# Altium PCB opm.PcbDoc (part 5 of 6)
Units mil, origin at the board's own origin, x right, y up, seen from the top; angles counter-clockwise.
Board outline 4280 x 1445 mil, 4 copper layers (Signal Plane 1, Ground, Power, Signal Plane 2), stack 59.778 mil thick; 104 components, 61 nets, 369 pads, 159 vias.
Unrouted connection lines stored in the file: 4.
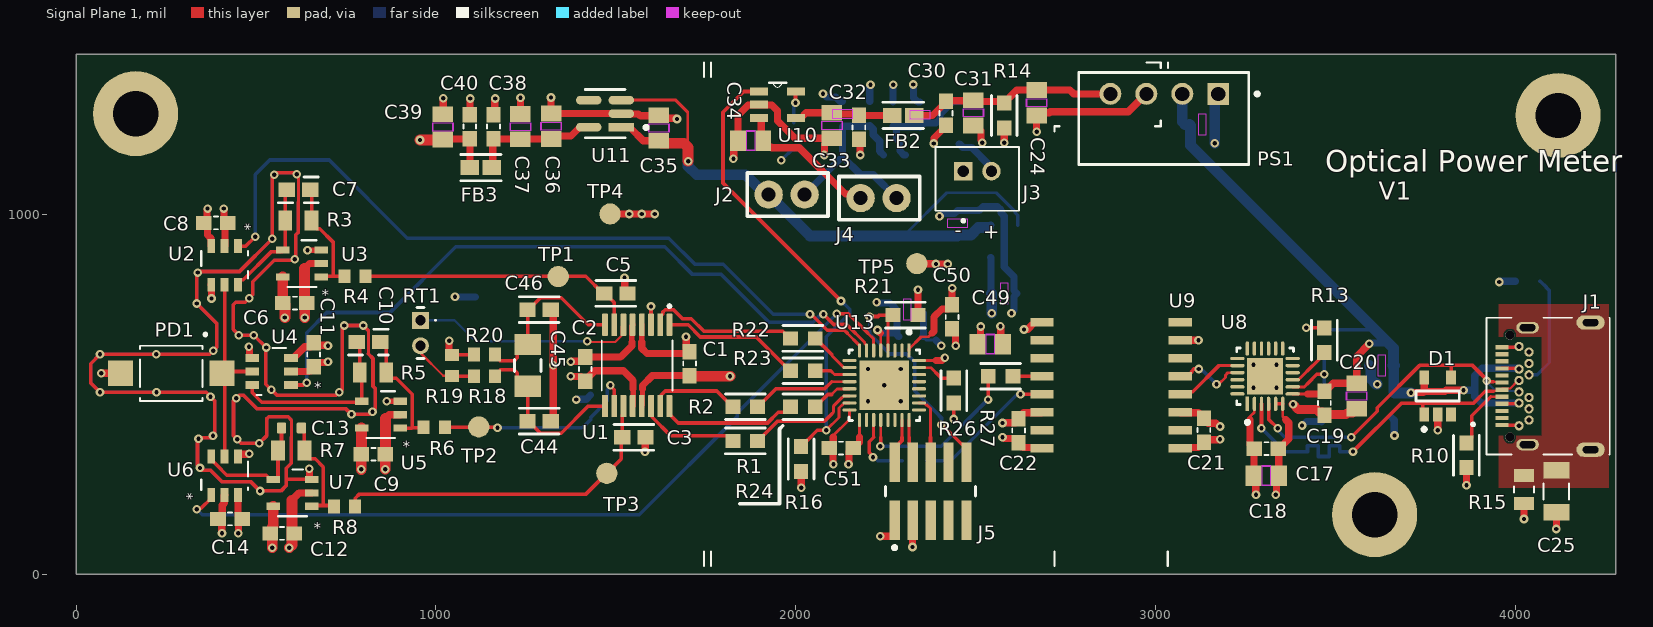
[diagram p0: Signal Plane 1 view]

## Part data (continued)
U3 U5 U7: "Operational Amplifier, 1 Func, 10uV Offset-Max, CMOS, PDSO5", Case/Package=SOT-23, Manufacturer="Texas Instruments", Manufacturer Lifecycle Status=ACTIVE, Supplier Part Number=296-OPA392DBVRCT-ND, Category="Amplifiers - Op Amps, Buffer, Instrumentation", ComponentLink1Description=https://sigma.octopart.com:443/177332311/technical_drawing/Texas-Instruments-OPA392DBVR.pdf?src-supplier=Texas+Instruments, ComponentLink1URL=https://sigma.octopart.com:443/177332311/technical_drawing/Texas-Instruments-OPA392DBVR.pdf?src-supplier=Texas+Instruments, ComponentLink2Description=https://octopart.com:443/opatz8j6/c1?t=2psdxfNSZafVxdZ5ZNOl_DMkcfXgAtcE5XO0nlhC9-kLTH0c2kP_E6ruHRV4RGEK38csRC_DYUSTnen_0j9aC9POSpKpd2mOmgIqO1TNZiXP5ogQozriVbhzqyHbfblWK9OPstIRr3cIrP4FTJ3WcbJ8ET0v1-Z7kljowUcj_5K4IJqpraLjHJ5d995DU-lA3G2MPIFIXdaph2QRYft4ozPdd11jQDbsfTgRIyz7ERvETa37RUgzg66PFoB_swOAjP9cfoHRkuZkn4NuOIfyLPnaU4R5TYlgQQeAViWQJQio1V6w93uzbKeQY1bgaQenG3g0HikSLeAPpnaTmz4osCeyHBYWX4HUltq8GmsHKlpVITfwiReMVGzsZjFepJ_Thh7pRw&src-supplier=Texas+Instruments, ComponentLink2URL=https://octopart.com:443/opatz8j6/c1?t=2psdxfNSZafVxdZ5ZNOl_DMkcfXgAtcE5XO0nlhC9-kLTH0c2kP_E6ruHRV4RGEK38csRC_DYUSTnen_0j9aC9POSpKpd2mOmgIqO1TNZiXP5ogQozriVbhzqyHbfblWK9OPstIRr3cIrP4FTJ3WcbJ8ET0v1-Z7kljowUcj_5K4IJqpraLjHJ5d995DU-lA3G2MPIFIXdaph2QRYft4ozPdd11jQDbsfTgRIyz7ERvETa37RUgzg66PFoB_swOAjP9cfoHRkuZkn4NuOIfyLPnaU4R5TYlgQQeAViWQJQio1V6w93uzbKeQY1bgaQenG3g0HikSLeAPpnaTmz4osCeyHBYWX4HUltq8GmsHKlpVITfwiReMVGzsZjFepJ_Thh7pRw&src-supplier=Texas+Instruments, ComponentLink3Description=https://sigma.octopart.com:443/175570406/technical_drawing/Texas-Instruments-OPA392DBVR.pdf?src-supplier=Texas+Instruments, ComponentLink3URL=https://sigma.octopart.com:443/175570406/technical_drawing/Texas-Instruments-OPA392DBVR.pdf?src-supplier=Texas+Instruments, ComponentLink4Description=https://sigma.octopart.com:443/169406034/technical_drawing/Texas-Instruments-OPA392DBVR.pdf?src-supplier=Texas+Instruments, ComponentLink4URL=https://sigma.octopart.com:443/169406034/technical_drawing/Texas-Instruments-OPA392DBVR.pdf?src-supplier=Texas+Instruments, ComponentLink5Description=https://sigma.octopart.com:443/155939316/technical_drawing/Texas-Instruments-OPA392DBVR.pdf?src-supplier=Texas+Instruments, ComponentLink5URL=https://sigma.octopart.com:443/155939316/technical_drawing/Texas-Instruments-OPA392DBVR.pdf?src-supplier=Texas+Instruments, ComponentLink6Description=https://datasheet.octopart.com:443/OPA392DBVR-Texas-Instruments-datasheet-178481860.pdf?src-supplier=LCSC, ComponentLink6URL=https://datasheet.octopart.com:443/OPA392DBVR-Texas-Instruments-datasheet-178481860.pdf?src-supplier=LCSC, ComponentLink7Description=https://datasheet.octopart.com:443/OPA392DBVR-Texas-Instruments-datasheet-166100503.pdf?src-supplier=Augswan, ComponentLink7URL=https://datasheet.octopart.com:443/OPA392DBVR-Texas-Instruments-datasheet-166100503.pdf?src-supplier=Augswan, ComponentLink8Description=https://datasheet.octopart.com:443/OPA392DBVR-Texas-Instruments-datasheet-165811579.pdf?src-supplier=SHENGYU+ELECTRONICS, ComponentLink8URL=https://datasheet.octopart.com:443/OPA392DBVR-Texas-Instruments-datasheet-165811579.pdf?src-supplier=SHENGYU+ELECTRONICS, ComponentLink9Description=http://sigma.octopart.com:80/reach_statement/Texas-Instruments-company-64.pdf?src-supplier=Compliance+Statements, ComponentLink9URL=http://sigma.octopart.com:80/reach_statement/Texas-Instruments-company-64.pdf?src-supplier=Compliance+Statements, ComponentLink10Description=http://sigma.octopart.com:80/conflict_mineral_statement/Texas-Instruments-company-63.pdf?src-supplier=Compliance+Statements, ComponentLink10URL=http://sigma.octopart.com:80/conflict_mineral_statement/Texas-Instruments-company-63.pdf?src-supplier=Compliance+Statements, Height=1.45mm, Length=2.9mm, Lifecycle Status=Production, Manufacturer Part Number=OPA392DBVR, Number of Channels=1, Pins=5, Pricing="1=2.31, 10=1.711, 25=1.5616, 100=1.3976, 250=1.31936, 500=1.27218, 1000=1.23335 (USD)", RoHS=Compliant, Stock=8819, Supplier=DigiKey, Supplier 1=DigiKey, Supplier Part Number 1=296-OPA392DBVRCT-ND, Thickness=1.2mm, Width=1.6mm
U8: "Full Speed USB to UART Bridge USB 2.0 3.3V T/R Automotive Medical 24-Pin QFN EP", Ambient Temperature Range High=85°C, Manufacturer="Silicon Lab", Manufacturer Lifecycle Status="FULL PRODUCTION", Max Junction Temperature (Tj)=105°C, Max Supply Voltage=3.6V, Min Operating Temperature=-40°C, Min Supply Voltage=3V, Operating Supply Voltage=3.3V, Supplier Part Number=336-5888-1-ND, Category="USB Interface ICs", China RoHS=Compliant, ComponentLink1Description=https://datasheet.octopart.com:443/CP2102N-A02-GQFN24R-Silicon-Labs-datasheet-138898368.pdf?src-supplier=SHENGYU+ELECTRONICS, ComponentLink1URL=https://datasheet.octopart.com:443/CP2102N-A02-GQFN24R-Silicon-Labs-datasheet-138898368.pdf?src-supplier=SHENGYU+ELECTRONICS, ComponentLink2Description=https://datasheet.octopart.com:443/CP2102N-A02-GQFN24R-Silicon-Labs-datasheet-166051788.pdf?src-supplier=Burklin+Elektronik, ComponentLink2URL=https://datasheet.octopart.com:443/CP2102N-A02-GQFN24R-Silicon-Labs-datasheet-166051788.pdf?src-supplier=Burklin+Elektronik, Data Rate=1.5Mbps, Harmonized Tariff Schedule (HTS) Code=8542.31.00.30, Height=800µm, Height - Seated (Max)=800µm, Interface=UART, Introduction Date=2019-03-12, Length=4mm, Lifecycle Status=Production, Manufacturer Part Number=CP2102N-A02-GQFN24R, Max Operating Temperature=85°C, Number of Digital IO=4, Number of Terminals=24, Pricing="1=4.14, 10=3.135, 25=2.8832, 100=2.6064, 250=2.4744, 500=2.39488, 1500=2.29663, 3000=2.24855 (USD)", REACH SVHC=Yes, RoHS=Compliant, Schedule B="8542390000, 8542390000|8542390000|8542390000|8542390000|8542390000", Stock=4906, Supplier=DigiKey, Supplier 1=DigiKey, Supplier Part Number 1=336-5888-1-ND, Terminal Pitch=500µm, Width=4mm
U9: "Robust EMC, dual-channel, 1/1, reinforced digital isolator 16-SOIC -55 to 125", Case/Package=SOIC, Manufacturer="Texas Instruments", Manufacturer Lifecycle Status=ACTIVE, Max Operating Temperature=125°C, Min Operating Temperature=-55°C, Supplier Part Number=296-50346-1-ND, Category="Digital Isolators", ComponentLink1Description=https://sigma.octopart.com:443/99572200/technical_drawing/Texas-Instruments-ISO7721FDWR.pdf?src-supplier=Texas+Instruments, ComponentLink1URL=https://sigma.octopart.com:443/99572200/technical_drawing/Texas-Instruments-ISO7721FDWR.pdf?src-supplier=Texas+Instruments, ComponentLink2Description=https://octopart.com:443/opatz8j6/c1?t=7fYOYtwNBUEaReeiSNPKR-IQTSHtPzZLpEVsYW50-rI4JUCIXMgBGopjK2FdCQMXUXQ-KoFbFgS2LTJLiiX2WyWA5udG3IK2j6SgmN4JQvkXOYML3Ru7cjprp3Zc3qOpQdFanhYDUQW26ho2EsapyHcXMNt5EZdsXuKUN3ISaEbLkfiXXEzz7HEq8WMwRB8Aqd5tdK01DpiPJHkcMp10MHJRnMsJhn7JgtWigsYiqP7VY3Loe05ONAdv-SR9SBa75Bo6RB95V0VZTFuhoHL9pJR-cKwyNCiWL4P9UL-Wk2sTIQiD-yqPyAT38kYpY1lIfmL_2dTAxBFtMmWy2P2-vcTNy0fZSuyP9lqQvE83YPMmP1FF12k6hwHlrQbjr1kRsM-PxQ&src-supplier=Texas+Instruments, ComponentLink2URL=https://octopart.com:443/opatz8j6/c1?t=7fYOYtwNBUEaReeiSNPKR-IQTSHtPzZLpEVsYW50-rI4JUCIXMgBGopjK2FdCQMXUXQ-KoFbFgS2LTJLiiX2WyWA5udG3IK2j6SgmN4JQvkXOYML3Ru7cjprp3Zc3qOpQdFanhYDUQW26ho2EsapyHcXMNt5EZdsXuKUN3ISaEbLkfiXXEzz7HEq8WMwRB8Aqd5tdK01DpiPJHkcMp10MHJRnMsJhn7JgtWigsYiqP7VY3Loe05ONAdv-SR9SBa75Bo6RB95V0VZTFuhoHL9pJR-cKwyNCiWL4P9UL-Wk2sTIQiD-yqPyAT38kYpY1lIfmL_2dTAxBFtMmWy2P2-vcTNy0fZSuyP9lqQvE83YPMmP1FF12k6hwHlrQbjr1kRsM-PxQ&src-supplier=Texas+Instruments, ComponentLink3Description=https://sigma.octopart.com:443/49250197/technical_drawing/Texas-Instruments-ISO7721FDWR.pdf?src-supplier=Texas+Instruments, ComponentLink3URL=https://sigma.octopart.com:443/49250197/technical_drawing/Texas-Instruments-ISO7721FDWR.pdf?src-supplier=Texas+Instruments, ComponentLink4Description=https://datasheet.octopart.com:443/ISO7721FDWR-Texas-Instruments-datasheet-164414773.pdf?src-supplier=Augswan, ComponentLink4URL=https://datasheet.octopart.com:443/ISO7721FDWR-Texas-Instruments-datasheet-164414773.pdf?src-supplier=Augswan, ComponentLink5Description=https://datasheet.octopart.com:443/ISO7721FDWR-Texas-Instruments-datasheet-82513802.pdf?src-supplier=HQonline, ComponentLink5URL=https://datasheet.octopart.com:443/ISO7721FDWR-Texas-Instruments-datasheet-82513802.pdf?src-supplier=HQonline, ComponentLink6Description=http://sigma.octopart.com:80/reach_statement/Texas-Instruments-company-64.pdf?src-supplier=Compliance+Statements, ComponentLink6URL=http://sigma.octopart.com:80/reach_statement/Texas-Instruments-company-64.pdf?src-supplier=Compliance+Statements, ComponentLink7Description=http://sigma.octopart.com:80/conflict_mineral_statement/Texas-Instruments-company-63.pdf?src-supplier=Compliance+Statements, ComponentLink7URL=http://sigma.octopart.com:80/conflict_mineral_statement/Texas-Instruments-company-63.pdf?src-supplier=Compliance+Statements, Height=2.65mm, Length=10.3mm, Lifecycle Status=Production, Manufacturer Part Number=ISO7721FDWR, Number of Channels=2, Pins=16, Pricing="1=2.6, 10=1.935, 25=1.7688, 100=1.5864, 250=1.49932, 500=1.44684, 1000=1.40365 (USD)", RoHS=Compliant, Schedule B=8542390000, Stock=15300, Supplier=DigiKey, Supplier 1=DigiKey, Supplier Part Number 1=296-50346-1-ND, Thickness=2.35mm, Width=7.5mm
U10: "MCP73831 Series Single-Cell Li-Ion/Li-Polymer Battery Charge Controller SOT-23-5", Ambient Temperature Range High=85°C, Case/Package=SOT-23, Drain to Source Resistance=350mΩ, Manufacturer=Microchip, Manufacturer Lifecycle Status=REL, Max Charge Current=500mA, Max Junction Temperature (Tj)=125°C, Max Output Voltage=4.5V, Max Power Dissipation=1.54W, Max Supply Voltage=6V, Min Operating Temperature=-40°C, Min Output Voltage=4.168V, Min Supply Voltage=3.75V, Output Voltage=4.2V, Supplier Part Number=MCP73831T-2ACI/OTCT-ND, Voltage Rating=4.534V, Category="Battery Management", ComponentLink1Description=https://datasheet.octopart.com:443/MCP73831T-2ACI-OT-Microchip-datasheet-8814540.pdf?src-supplier=element14+APAC, ComponentLink1URL=https://datasheet.octopart.com:443/MCP73831T-2ACI-OT-Microchip-datasheet-8814540.pdf?src-supplier=element14+APAC, ComponentLink2Description=https://datasheet.octopart.com:443/MCP73831T-2ACI-OT-Microchip-datasheet-145017548.pdf?src-supplier=Microchip, ComponentLink2URL=https://datasheet.octopart.com:443/MCP73831T-2ACI-OT-Microchip-datasheet-145017548.pdf?src-supplier=Microchip, ComponentLink3Description=https://datasheet.octopart.com:443/MCP73831T-2ACI-OT-Microchip-datasheet-34193478.pdf?src-supplier=Farnell, ComponentLink3URL=https://datasheet.octopart.com:443/MCP73831T-2ACI-OT-Microchip-datasheet-34193478.pdf?src-supplier=Farnell, ComponentLink4Description=https://datasheet.octopart.com:443/MCP73831T-2ACI-OT-Microchip-datasheet-16123459.pdf?src-supplier=LKR, ComponentLink4URL=https://datasheet.octopart.com:443/MCP73831T-2ACI-OT-Microchip-datasheet-16123459.pdf?src-supplier=LKR, ComponentLink5Description=https://datasheet.octopart.com:443/MCP73831T-2ACI-OT-Microchip-datasheet-142675560.pdf?src-supplier=TME, ComponentLink5URL=https://datasheet.octopart.com:443/MCP73831T-2ACI-OT-Microchip-datasheet-142675560.pdf?src-supplier=TME, ComponentLink6Description=https://datasheet.octopart.com:443/MCP73831T-2ACI-OT-Microchip-datasheet-158592061.pdf?src-supplier=SHENGYU+ELECTRONICS, ComponentLink6URL=https://datasheet.octopart.com:443/MCP73831T-2ACI-OT-Microchip-datasheet-158592061.pdf?src-supplier=SHENGYU+ELECTRONICS, ComponentLink7Description=https://datasheet.octopart.com/MCP73831T-2ACI-OT-Microchip-datasheet-16593012.pdf, ComponentLink7URL=https://datasheet.octopart.com/MCP73831T-2ACI-OT-Microchip-datasheet-16593012.pdf, ComponentLink8Description=https://datasheet.octopart.com:443/MCP73831T-2ACI-OT-Microchip-datasheet-7127743.pdf?src-supplier=Newark, ComponentLink8URL=https://datasheet.octopart.com:443/MCP73831T-2ACI-OT-Microchip-datasheet-7127743.pdf?src-supplier=Newark, ComponentLink9Description=https://datasheet.octopart.com:443/MCP73831T-2ACIOT-Microchip-datasheet-39874.pdf?src-supplier=RS+(Formerly+Allied+Electronics), ComponentLink9URL=https://datasheet.octopart.com:443/MCP73831T-2ACIOT-Microchip-datasheet-39874.pdf?src-supplier=RS+(Formerly+Allied+Electronics), ComponentLink10Description=http://sigma.octopart.com:80/188449423/materials_sheet/Microchip-MCP73831T-2ACI-OT.pdf?src-supplier=Compliance+Statements, ComponentLink10URL=http://sigma.octopart.com:80/188449423/materials_sheet/Microchip-MCP73831T-2ACI-OT.pdf?src-supplier=Compliance+Statements, ComponentLink11Description=http://sigma.octopart.com:80/rohs_statement/Microchip-company-71.pdf?src-supplier=Compliance+Statements, ComponentLink11URL=http://sigma.octopart.com:80/rohs_statement/Microchip-company-71.pdf?src-supplier=Compliance+Statements, ComponentLink12Description=http://sigma.octopart.com:80/reach_statement/Microchip-company-70.pdf?src-supplier=Compliance+Statements, ComponentLink12URL=http://sigma.octopart.com:80/reach_statement/Microchip-company-70.pdf?src-supplier=Compliance+Statements, ComponentLink13Description=http://sigma.octopart.com:80/conflict_mineral_statement/Microchip-company-69.pdf?src-supplier=Compliance+Statements, ComponentLink13URL=http://sigma.octopart.com:80/conflict_mineral_statement/Microchip-company-69.pdf?src-supplier=Compliance+Statements, ComponentLink14Description=http://sigma.octopart.com:80/conflict_mineral_statement/Microchip-company-68.pdf?src-supplier=Compliance+Statements, ComponentLink14URL=http://sigma.octopart.com:80/conflict_mineral_statement/Microchip-company-68.pdf?src-supplier=Compliance+Statements, Contact Plating=Tin, Country of Assembly=Thailand, Country of Fabrication="United States of America", Country of Origin=Thailand, Export Control Classification Number (ECCN) Code=EAR99, Harmonized Tariff Schedule (HTS) Code=8542.39.0060, Height=1.45mm, Introduction Date=2005-11-03, Length=3.0988mm, Lifecycle Status=Production, Manufacturer Part Number=MCP73831T-2ACI/OT, Max Operating Temperature=85°C, Mounting Technology="Surface Mount", Nominal Supply Voltage=6V, Number of Cells=1, Number of Channels=1, Number of Outputs=1, Output Current=500mA, Packaging="Cut Tape", Pins=5, Pricing="1=0.76, 25=0.63, 100=0.6125, 3000=0.6125 (USD)", Projected EOL Date=2034-11-03, Radiation Hardening=No, REACH SVHC=No, RoHS=Compliant, Schedule B="8542390000, 8542390000|8542390000|8542390000|8542390000|8542390000", Stock=57203, Supplier=DigiKey, Supplier 1=DigiKey, Supplier Part Number 1=MCP73831T-2ACI/OTCT-ND, Termination=SMD/SMT, Weight=200.998119mg, Width=1.8034mm
U11 U12: "300mA ultra-low-noise low-IQ low-dropout (LDO) linear regulator with high PSRR 5-SOT-23 -40 to 125", Case/Package=SOT-23, Dropout Voltage=145mV, Manufacturer="Texas Instruments", Manufacturer Lifecycle Status=ACTIVE, Max Junction Temperature (Tj)=125°C, Max Supply Voltage=6V, Min Operating Temperature=-40°C, Min Supply Voltage=1.6V, Nominal Supply Current=6.5µA, Output Current=300mA, Output Voltage=3.3V, Supplier Part Number=296-TPS7A2033PDBVRCT-ND, Accuracy=1.5%, Category="LDO Voltage Regulators", ComponentLink1Description=https://sigma.octopart.com:443/177332311/technical_drawing/Texas-Instruments-TPS7A2033PDBVR.pdf?src-supplier=Texas+Instruments, ComponentLink1URL=https://sigma.octopart.com:443/177332311/technical_drawing/Texas-Instruments-TPS7A2033PDBVR.pdf?src-supplier=Texas+Instruments, ComponentLink2Description=https://octopart.com:443/opatz8j6/c1?t=Ma8ufZnKKk_4ATfb14C_eP2QaxaiRthHQJtKusmYO_-I-6JGC8iIHetUtRdC5_axeXbCEdVp9wf_UwcPfgqubJ4i_D6qxU8SH4zIHwfuYwWyVKByeVOCLRFSq0GW-XiuJKOUh-wBrdD1nXJo4BUqX6aY_fyM7an4T8o1CX0IhOMrpo-oNm9IOAR28j7MeTK7I80W1Eorou5WEQqXmriVDRoiwD2NotTqdNxlTSj-cN8Ykvc373_5CdeRBai5zApiAgYKppeYOSbOx6psnqsn0rxystwDVuxyyyHYJZzgtMnq9lljAfaZpyzHt9L8kxL0UNrlsEGw1j5X7uv7jHvLsJxySSnFKRKe-mWLHk6Ye7ZFi91ueAVDnT7aMGRA6_kgJkxV3l4&src-supplier=Texas+Instruments, ComponentLink2URL=https://octopart.com:443/opatz8j6/c1?t=Ma8ufZnKKk_4ATfb14C_eP2QaxaiRthHQJtKusmYO_-I-6JGC8iIHetUtRdC5_axeXbCEdVp9wf_UwcPfgqubJ4i_D6qxU8SH4zIHwfuYwWyVKByeVOCLRFSq0GW-XiuJKOUh-wBrdD1nXJo4BUqX6aY_fyM7an4T8o1CX0IhOMrpo-oNm9IOAR28j7MeTK7I80W1Eorou5WEQqXmriVDRoiwD2NotTqdNxlTSj-cN8Ykvc373_5CdeRBai5zApiAgYKppeYOSbOx6psnqsn0rxystwDVuxyyyHYJZzgtMnq9lljAfaZpyzHt9L8kxL0UNrlsEGw1j5X7uv7jHvLsJxySSnFKRKe-mWLHk6Ye7ZFi91ueAVDnT7aMGRA6_kgJkxV3l4&src-supplier=Texas+Instruments, ComponentLink3Description=https://sigma.octopart.com:443/175570406/technical_drawing/Texas-Instruments-TPS7A2033PDBVR.pdf?src-supplier=Texas+Instruments, ComponentLink3URL=https://sigma.octopart.com:443/175570406/technical_drawing/Texas-Instruments-TPS7A2033PDBVR.pdf?src-supplier=Texas+Instruments, ComponentLink4Description=https://sigma.octopart.com:443/169406034/technical_drawing/Texas-Instruments-TPS7A2033PDBVR.pdf?src-supplier=Texas+Instruments, ComponentLink4URL=https://sigma.octopart.com:443/169406034/technical_drawing/Texas-Instruments-TPS7A2033PDBVR.pdf?src-supplier=Texas+Instruments, ComponentLink5Description=https://sigma.octopart.com:443/155939316/technical_drawing/Texas-Instruments-TPS7A2033PDBVR.pdf?src-supplier=Texas+Instruments, ComponentLink5URL=https://sigma.octopart.com:443/155939316/technical_drawing/Texas-Instruments-TPS7A2033PDBVR.pdf?src-supplier=Texas+Instruments, ComponentLink6Description=https://datasheet.octopart.com:443/TPS7A2033PDBVR-Texas-Instruments-datasheet-149070019.pdf?src-supplier=Upverter, ComponentLink6URL=https://datasheet.octopart.com:443/TPS7A2033PDBVR-Texas-Instruments-datasheet-149070019.pdf?src-supplier=Upverter, ComponentLink7Description=https://datasheet.octopart.com:443/TPS7A2033PDBVR-Texas-Instruments-datasheet-164420832.pdf?src-supplier=Augswan, ComponentLink7URL=https://datasheet.octopart.com:443/TPS7A2033PDBVR-Texas-Instruments-datasheet-164420832.pdf?src-supplier=Augswan, ComponentLink8Description=https://datasheet.octopart.com:443/TPS7A2033PDBVR-Texas-Instruments-datasheet-159781690.pdf?src-supplier=LCSC, ComponentLink8URL=https://datasheet.octopart.com:443/TPS7A2033PDBVR-Texas-Instruments-datasheet-159781690.pdf?src-supplier=LCSC, ComponentLink9Description=http://sigma.octopart.com:80/reach_statement/Texas-Instruments-company-64.pdf?src-supplier=Compliance+Statements, ComponentLink9URL=http://sigma.octopart.com:80/reach_statement/Texas-Instruments-company-64.pdf?src-supplier=Compliance+Statements, ComponentLink10Description=http://sigma.octopart.com:80/conflict_mineral_statement/Texas-Instruments-company-63.pdf?src-supplier=Compliance+Statements, ComponentLink10URL=http://sigma.octopart.com:80/conflict_mineral_statement/Texas-Instruments-company-63.pdf?src-supplier=Compliance+Statements, Height=1.45mm, Length=2.9mm, Lifecycle Status=Production, Manufacturer Part Number=TPS7A2033PDBVR, Max Operating Temperature=125°C, Number of Channels=1, Number of Outputs=1, Pins=5, Pricing="1=0.32, 10=0.218, 25=0.1936, 100=0.1665, 250=0.15364, 500=0.1459, 1000=0.13951 (USD)", RoHS=Compliant, Stock=15596, Supplier=DigiKey, Supplier 1=DigiKey, Supplier Part Number 1=296-TPS7A2033PDBVRCT-ND, Thickness=1.2mm, Width=1.6mm
U13: "MCU 32-bit Ultra Low Power STM32L ARM Cortex-M4 RISC 256kB Flash 32-Pin QFN ECOPACK2 Tray", Ambient Temperature Range High=85°C, Clock Frequency=48MHz, Frequency=80MHz, Manufacturer=STMicroelectronics, Max Junction Temperature (Tj)=105°C, Max Supply Current=9.8mA, Max Supply Voltage=3.6V, Min Operating Temperature=-40°C, Min Supply Voltage=1.71V, Nominal Supply Current=10nA, Operating Supply Voltage=1.8V, Supplier Part Number=497-16578-ND, ADC Channels (Resolution)="10-Ch 12-Bit", Category=Microcontrollers, China RoHS=Compliant, ComponentLink1Description=https://datasheet.octopart.com:443/STM32L432KCU6-STMicroelectronics-datasheet-137130199.pdf?src-supplier=IHS, ComponentLink1URL=https://datasheet.octopart.com:443/STM32L432KCU6-STMicroelectronics-datasheet-137130199.pdf?src-supplier=IHS, ComponentLink2Description=https://datasheet.octopart.com:443/STM32L432KCU6-STMicroelectronics-datasheet-62336852.pdf?src-supplier=SHENGYU+ELECTRONICS, ComponentLink2URL=https://datasheet.octopart.com:443/STM32L432KCU6-STMicroelectronics-datasheet-62336852.pdf?src-supplier=SHENGYU+ELECTRONICS, ComponentLink3Description=https://datasheet.octopart.com:443/STM32L432KCU6-STMicroelectronics-datasheet-62069833.pdf?src-supplier=STMicroelectronics, ComponentLink3URL=https://datasheet.octopart.com:443/STM32L432KCU6-STMicroelectronics-datasheet-62069833.pdf?src-supplier=STMicroelectronics, ComponentLink4Description=https://datasheet.octopart.com:443/STM32L432KCU6-STMicroelectronics-datasheet-104429914.pdf?src-supplier=element14+APAC, ComponentLink4URL=https://datasheet.octopart.com:443/STM32L432KCU6-STMicroelectronics-datasheet-104429914.pdf?src-supplier=element14+APAC, ComponentLink5Description=https://datasheet.octopart.com:443/STM32L432KCU6-STMicroelectronics-datasheet-62336760.pdf?src-supplier=Future+Electronics, ComponentLink5URL=https://datasheet.octopart.com:443/STM32L432KCU6-STMicroelectronics-datasheet-62336760.pdf?src-supplier=Future+Electronics, Core Architecture="ARM Cortex-M4", Country of Origin="Mainland China, Taiwan", DAC Channels (Resolution)="2-Ch 12-Bit", Data Bus Width=32b, EEPROM Memory Size=0B, Export Control Classification Number (ECCN) Code=3A991.A.2, Flash Memory Size=256kB, Harmonized Tariff Schedule (HTS) Code=8542.31.00.25, Height=600µm, Height - Seated (Max)=600µm, Interface="CAN, QSPI, USB", Introduction Date=2018-05-25, Lead Free="Lead Free", Length=5mm, Lifecycle Status=Production, Manufacturer Part Number=STM32L432KCU6, Max Operating Temperature=85°C, Memory Format=FLASH, Memory Size=256kB, Number of A/D Converters=1, Number of ADC Channels=11, Number of Channels=10, Number of D/A Converters=2, Number of I2C Channels=2, Number of I/Os=3, Number of Interrupts=16, Number of PWM Channels=1, Number of SPI Channels=2, Number of Terminals=32, Number of Timers/Counters=9, Number of UART Channels=3, Number of USART Channels=2, Number of USB Channels=1, Peripherals=PWM, Pins=32, Pricing="1=4.79, 10=3.641, 25=3.3548, 100=3.04, 250=2.88996, 500=2.7995, 1000=2.72507, 2940=2.63456 (USD)", RAM Size=64kB, REACH SVHC=Yes, RoHS=Compliant, Schedule B="8542310000, 8542310000|8542310000|8542310000|8542310000|8542310000", Stock=7419, Supplier=DigiKey, Supplier 1=DigiKey, Supplier Part Number 1=497-16578-ND, Terminal Pitch=500µm, Width=5mm

## Free pads (board coordinates)
  round 59.05 smd paste-100: 15(1484,1001) 16(2337,863) TP1(1340,827) TP2(1119,409) TP3(1475,280)
  round 236.22 hole 125.98 mask+0: MH1(165,1280)
  round 236.22 hole 125.98 unplated: MH2(4120,1275) MH3(3610,165)

## Via types
v1: diameter 24, hole 12, Signal Plane 1 to Signal Plane 2, tented both sides, 150 vias
v2: diameter 24, hole 12, Signal Plane 1 to Signal Plane 2, tented bottom, 9 vias